# EAGLE board JetRacerWIfiAntennaSupport_partsRev6 (EAGLE 9.6.2)

Size 135.88 x 17 mm. Coordinates in mm from the lower left corner, seen from the top.
Outline: 8.81,8.47 arc90 5.46,11.87 arc59 2.81,10.37 2.81,6.57 arc59 5.46,5.12 arc90 8.81,8.47
Outline: 16.14,15.2 41.44,17 94.44,17 119.74,15.2 132.74,14.2 arc-59 134.74,13 arc-16 135.54,11.6 135.84,9.5 arc-27 135.44,6.2 arc-6 132.54,2.4 94.44,0 41.44,0 3.34,2.4 arc-6 0.44,6.2 arc-27 0.04,9.5 0.34,11.6 arc-16 1.14,13 arc-59 3.14,14.2 16.14,15.2
Outline: 127.07,8.47 arc-90 130.42,11.87 arc-59 133.07,10.37 133.07,6.57 arc-59 130.42,5.12 arc-90 127.07,8.47
Copper layers (1*16): Top 0.035mm / dielectric 1.5mm / Bottom 0.035mm
Design rules "SeeedStudio_2layer_DRU_no_angle_20140221": minimum track width 6mil, minimum drill 12mil, track to track 6mil, track to pad 6mil, pad to pad 6mil, via to via 6mil, smd to smd 0mil, copper to edge 10mil, drill to drill 10mil, minimum pad ring 10mil, minimum via ring 6mil, stop-mask expansion 2mil, vias tented up to drill 100mil, thermal gap 10mil
Holes 3.6 mm at 45.94,3.5 45.94,13.5 89.94,3.5 89.94,13.5

## Placement (x,y rotation side)
E$1  [LOGO_FABO_L]  67.98,5.83 0 top

## Library data of the parts
E$1 = FaBo-Logo

## Text on the board
tPlace: JR-WS | Rev6 | TOP
bPlace: BOTTOM
tDocu: UPPER PANEL LINE | 長径 6.7mm / 短径 5.7mm *2 | Φ3.6mm*4 | JETSON NANO LINE | JETSON NANO SPECER
bDocu: UPPER PANEL LINE | Φ3.6mm*4